# EAGLE board SLIM_Faraday_Detector_v1 (EAGLE 9.6.2)
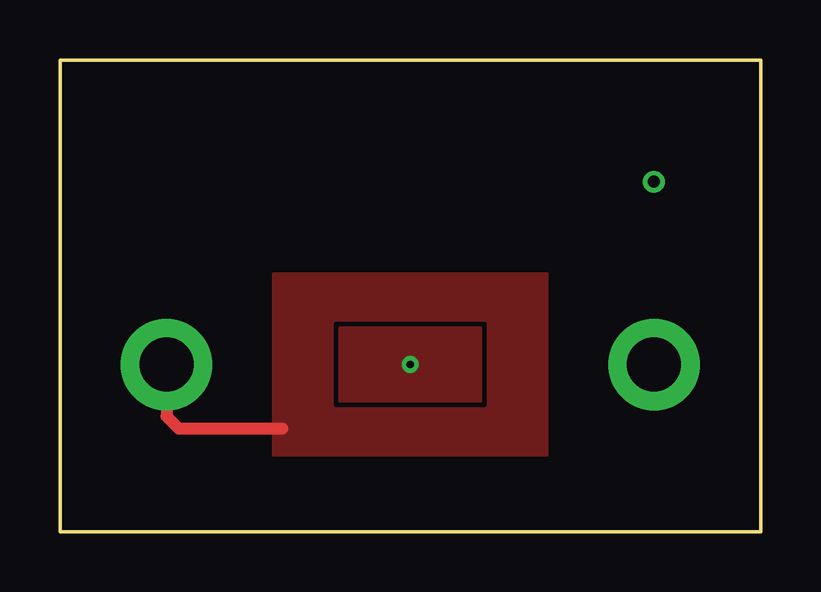
[diagram p0: board, top side]
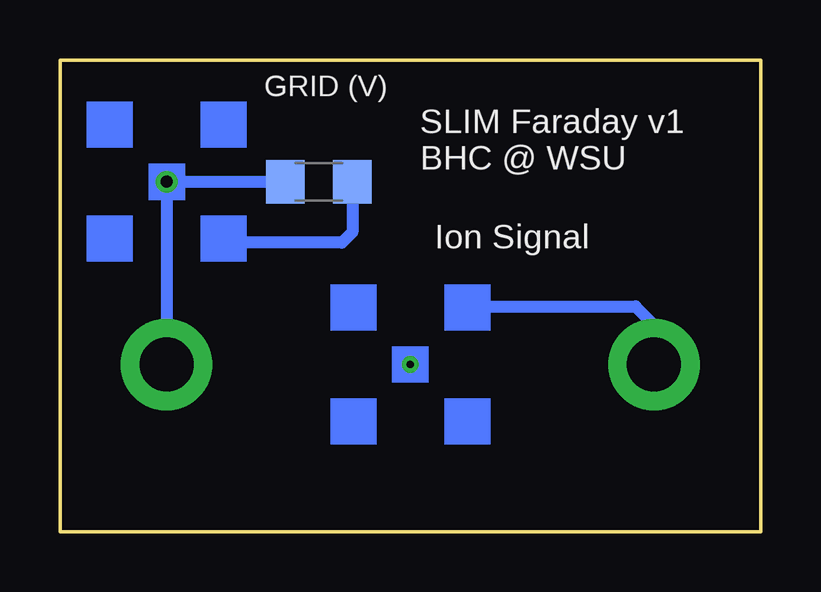
[diagram p1: board, bottom side, seen from below]

Size 29.21 x 19.68 mm. Coordinates in mm from the lower left corner, seen from the top.
Outline: 0,0 0,19.68 29.21,19.68 29.21,0 0,0
Copper layers (1*16): Top 0.035mm / dielectric 1.5mm / Bottom 0.035mm
Design rules "default": minimum track width 10mil, minimum drill 24mil, track to track 8mil, track to pad 8mil, pad to pad 8mil, via to via 8mil, smd to smd 8mil, copper to edge 40mil, drill to drill 8mil, minimum pad ring 10mil, minimum via ring 8mil, stop-mask expansion 4mil, vias tented up to drill 0mil, thermal gap 10mil

## Footprints (pad centres in the part's own frame; a part is rotated, then mirrored left to right if it is on the bottom)
1206 = smd 1.6 x 1.8: 1 -1.4,0; 2 1.4,0

## Placement (x,y rotation side)
E$1  [1206]  18.41,14.61 0 bottom

## Library data of the parts
E$1 = SparkFun-Capacitors

## Nets
S$1: E$1.1
S$2: E$1.2

## Tracks (layer width: path | path; a pad name or v marks a point on that pad's centre or on a via)
FP  (via drill 0.3)
  other vias: 14.61,6.99
  pour Top: 17.53,5.46 11.68,5.46 11.68,8.51 17.53,8.51
GND  (via drill 2.26 pad 3.81)
  Top 0.508: v4.45,6.99 4.45,4.83 4.95,4.32 9.27,4.32
  Bottom 0.508: 11.42,9.41 5.22,9.41 4.45,8.64 v4.45,6.99
  pour Top (rank 3): 8.89,10.79 20.32,10.79 20.32,3.18 8.89,3.18
S$1  (via drill 0.5, 2.26 pad 3.81)
  Bottom 0.508: v24.77,6.99 v24.77,14.61 E$1.1
S$2
  Bottom 0.508: 22.23,12.07 17.45,12.07 17.02,12.5 E$1.2
(copper drawn outside any net)
  shapes: Bottom area x10

## Text on the board
bNames: GRID (V) | SLIM Faraday v1 / BHC @ WSU | Ion Signal